# EAGLE board DifferentialAmp (EAGLE 9.6.2)

No outline drawn. Coordinates in mm, seen from the top.
Copper layers (1*16): Top 0.035mm / dielectric 1.5mm / Bottom 0.035mm
Design rules "default": minimum track width 6mil, minimum drill 0.35mm, track to track 6mil, track to pad 6mil, pad to pad 6mil, via to via 6mil, smd to smd 6mil, copper to edge 40mil, drill to drill 6mil, minimum pad ring 10mil, minimum via ring 8mil, stop-mask expansion 4mil, vias tented up to drill 0mil, thermal gap 10mil

## Footprints (pad centres in the part's own frame; a part is rotated, then mirrored left to right if it is on the bottom)
C2.5-2 = drill 0.813 pad 1.6 octagon: 1 -1.27,0; 2 1.27,0
0204/5 = drill 0.813 octagon: 1 -2.54,0; 2 2.54,0
DIP794W45P254L959H508Q8 = drill 0.78 pad 1.13 square: 1 -3.97,3.81 | drill 0.78 pad 1.13: 2 -3.97,1.27; 3 -3.97,-1.27; 4 -3.97,-3.81; 5 3.97,-3.81; 6 3.97,-1.27; 7 3.97,1.27; 8 3.97,3.81

## Placement (x,y rotation side)
C3  [C2.5-2]  40.64,21.59 0 top
R1  [0204/5]  49.53,38.1 0 top
R2  [0204/5]  39.37,33.02 0 top
R3  [0204/5]  46.99,33.02 0 top
R4  [0204/5]  39.37,29.21 0 top
U1  TL082CP  [DIP794W45P254L959H508Q8]  30.48,27.94 0 top

## Library data of the parts
C3 = capacitor-wima
R1-R4 = rcl; SPICEPREFIX: R
U1 = TL082CP; AVAILABILITY: In Stock; CHECK_PRICES: https://www.snapeda.com/parts/TL082CP/Texas+Instruments/view-part/?ref=eda; DESCRIPTION: Dual, 30-V, 3-MHz, 13-V/µs slew rate, In to V+, JFET-input op amp; MF: Texas Instruments; MP: TL082CP; PACKAGE: PDIP-8 Texas; PRICE: None; PURCHASE-URL: https://www.snapeda.com/api/url_track_click_mouser/?unipart_id=854431&manufacturer=Texas Instruments&part_name=TL082CP&search_term=tl082; SNAPEDA_LINK: https://www.snapeda.com/parts/TL082CP/Texas+Instruments/view-part/?ref=snap

## Nets
1IN-: R2.2 R3.1 U1.5
1OUT: R1.1 R3.2 U1.1
2IN-: R1.2 R4.1 U1.6
AIN+: U1.2
AIN-: U1.3
GND: C3.1 R2.1
N$14: U1.8
N$15: U1.4
VDD: C3.2
VOD: R4.2 U1.7

## Tracks (layer width: path | path; a pad name or v marks a point on that pad's centre or on a via)
1IN-  (2 unrouted)
1OUT  (2 unrouted)
2IN-  (2 unrouted)
GND  (1 unrouted)
VOD  (1 unrouted)